# EAGLE board RJ11_DIP (EAGLE 8.2.2)
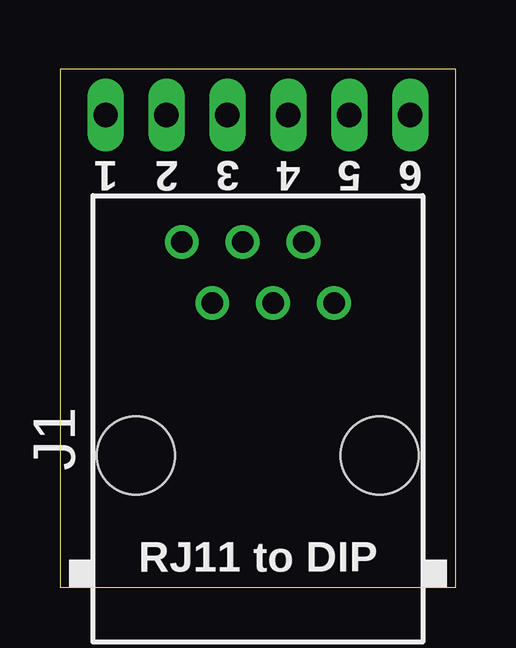
[diagram p0: board, top side]
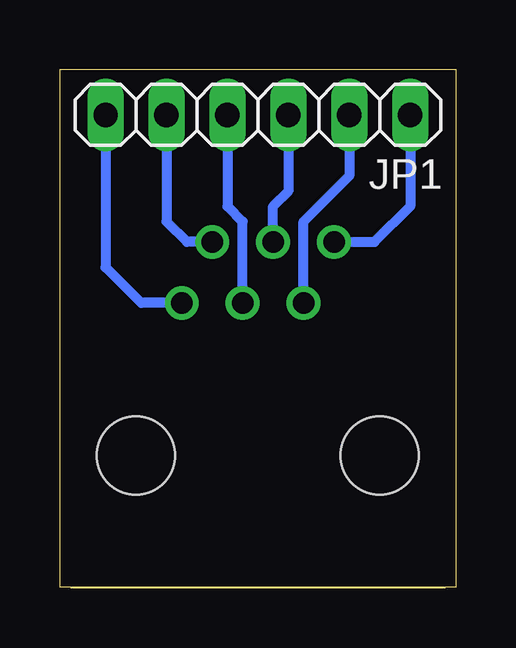
[diagram p1: board, bottom side, seen from below]

Size 16.51 x 21.6 mm. Coordinates in mm from the lower left corner, seen from the top.
Outline: 0,0.01 16.51,0.01 16.51,21.6 0,21.6 0,0.01
Copper layers (1*16): Top 0.035mm / dielectric 1.5mm / Bottom 0.035mm
Design rules "default": minimum track width 10mil, minimum drill 24mil, track to track 8mil, track to pad 8mil, pad to pad 8mil, via to via 8mil, smd to smd 8mil, copper to edge 40mil, drill to drill 8mil, minimum pad ring 10mil, minimum via ring 8mil, stop-mask expansion 4mil, vias tented up to drill 0mil, thermal gap 10mil

## Footprints (pad centres in the part's own frame; a part is rotated, then mirrored left to right if it is on the bottom)
RJ11-NO_SHIELD = drill 0.9 pad 1.4: 1 -3.175,8.89; 2 -1.905,6.35; 3 -0.635,8.89; 4 0.635,6.35; 5 1.905,8.89; 6 3.175,6.35 | hole 3.251: -5.08,0; 5.08,0
1X06 = drill 1.016 long: 1 -6.35,0; 2 -3.81,0; 3 -1.27,0; 4 1.27,0; 5 3.81,0; 6 6.35,0

## Placement (x,y rotation side)
J1  RJ11-2L-B  [RJ11-NO_SHIELD]  8.26,5.51 0 top
JP1  [1X06]  8.26,19.7 180 bottom

## Library data of the parts
J1 = con-tycoelectronics; MF: TYCO ELECTRONICS; MPN: RJ11-2L-B; OC_FARNELL: unknown; OC_NEWARK: 83F4463
JP1 = pinhead

## Nets
N$1: J1.1 JP1.1
N$2: J1.2 JP1.2
N$3: J1.3 JP1.3
N$4: J1.4 JP1.4
N$5: J1.5 JP1.5
N$6: J1.6 JP1.6

## Tracks (layer width: path | path; a pad name or v marks a point on that pad's centre or on a via)
N$1
  Bottom 0.406: J1.1 3.39,14.4 1.91,15.88 JP1.1
N$2
  Bottom 0.406: J1.2 6.35,15.25 4.45,17.16 JP1.2
N$3
  Bottom 0.406: J1.3 7.62,15.88 6.99,16.52 JP1.3
N$4
  Bottom 0.406: J1.4 8.89,15.25 9.53,15.88 JP1.4
N$5
  Bottom 0.406: J1.5 11.21,14.4 12.06,15.25 JP1.5
N$6
  Bottom 0.406: J1.6 13.12,11.86 14.61,13.35 JP1.6

## Text on the board
tPlace: 1 | 2 | 3 | 4 | 5 | 6 | RJ11 to DIP